# Altium PCB PCB.PcbDoc
Units mm, origin at the board's own origin, x right, y up, seen from the top; angles counter-clockwise.
Board outline 40.71 x 43.88 mm, 2 copper layers (Top Layer, Bottom Layer); 14 components, 10 nets, 39 pads, 0 vias.
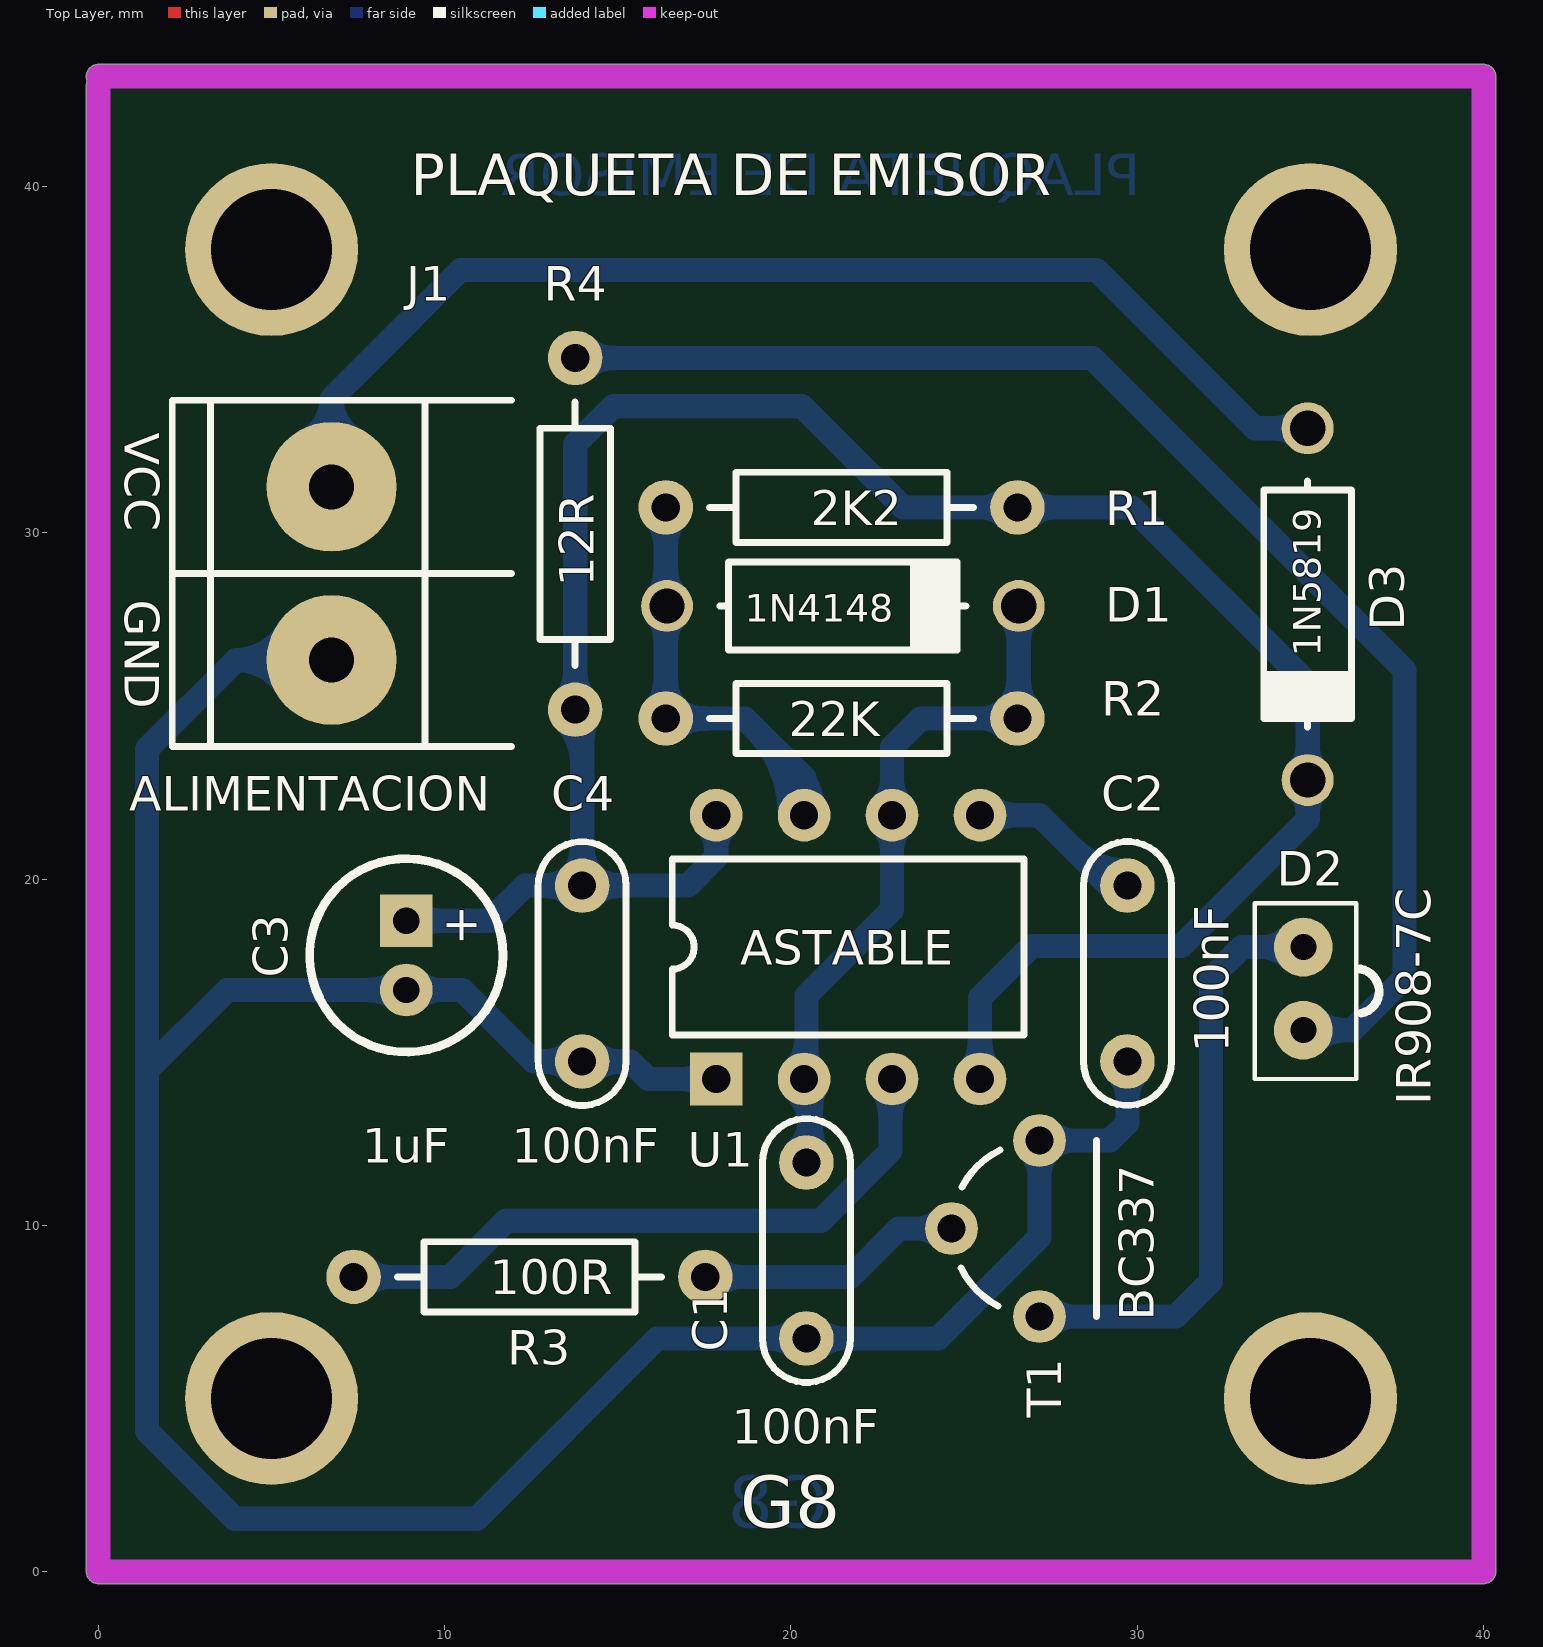
[diagram p0: Top Layer view]
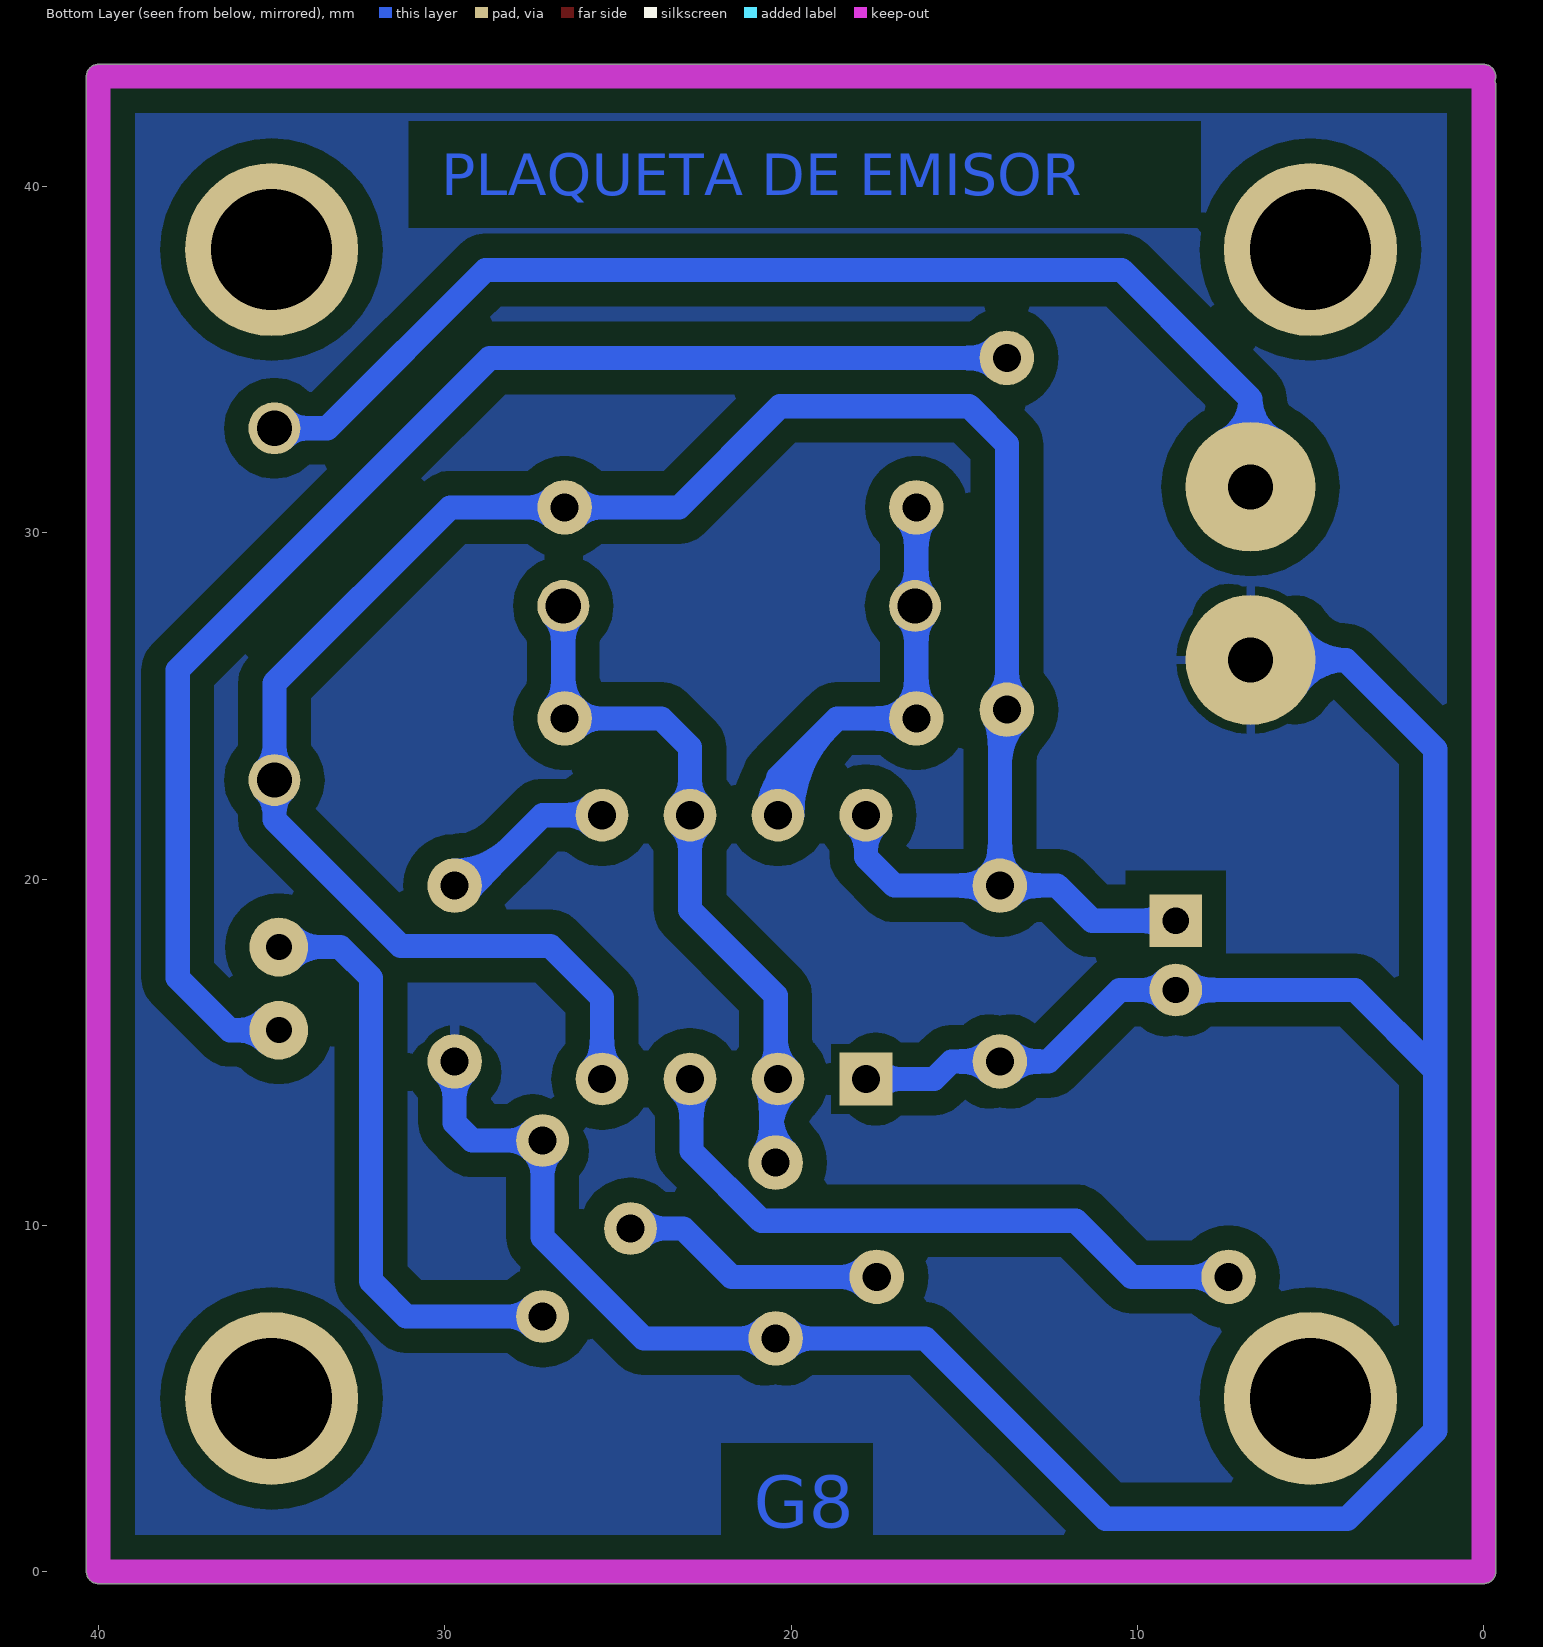
[diagram p1: Bottom Layer view, seen from below]
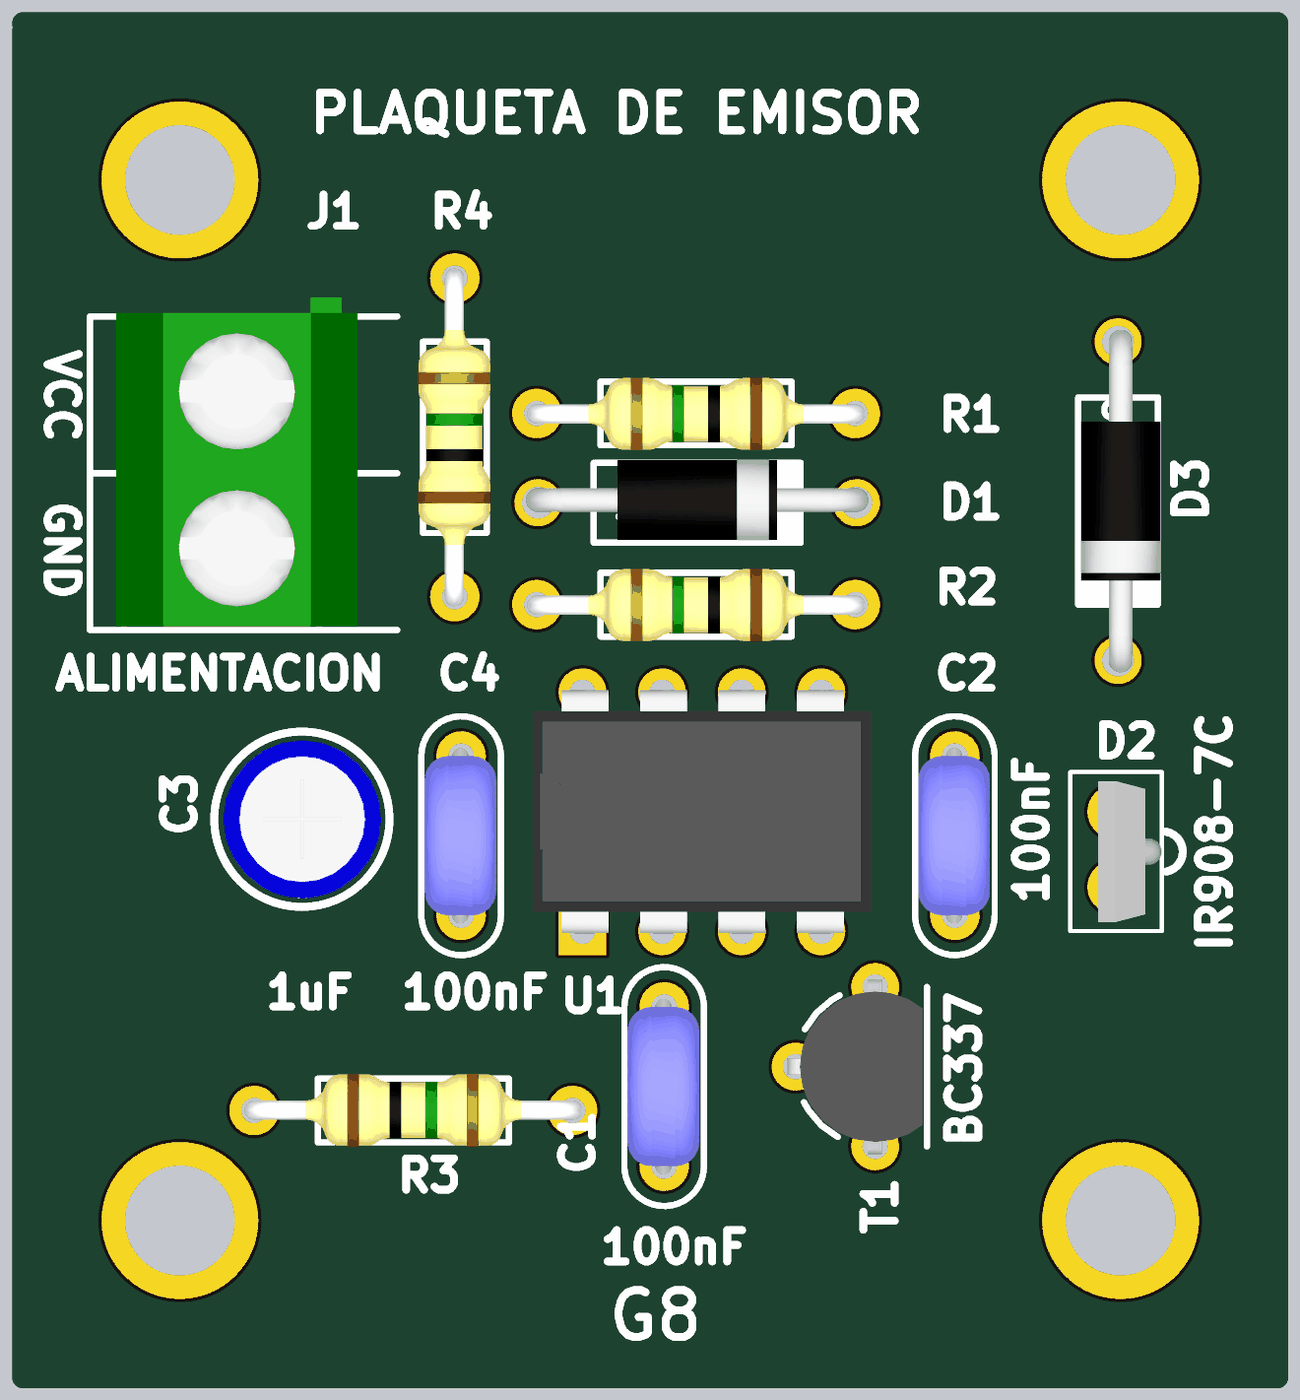
[diagram p2: 3D render of the assembled board from above, using the file's embedded part models]

## Layer stack, top to bottom
Top Solder: solder mask 0.0102, Solder Resist, Dk 3.5
Top Layer: signal copper 0.0356
Dielectric1: dielectric 0.32, FR-4, Dk 4.8
Bottom Layer: signal copper 0.0356
Bottom Solder: solder mask 0.0102, Solder Resist, Dk 3.5

## Board outline
-0.35,0 -0.35,42.926 cw(c0,42.926) -0.327,43.053 cw(c0,43.18) 0,43.53 40.005,43.53 cw(c40.005,43.18) 40.355,43.18 40.355,0 cw(c40.005,0) 40.005,-0.35 0,-0.35 cw(c0,0)

## Design rules (kind name [scope] priority, off if disabled: settings)
Clearance POLYGON [InPolygon] p1: gap=0.7
Clearance [All] p2: gap=0.3
PolygonConnect [All] p1: connectstyle=Relief reliefconductorwidth=0.254 reliefentries=4 polygonreliefangle="90 Angle" airgapwidth=0.254
RoutingVias [All] p1: holewidth=0.711 width=1.27 viastyle="Through Hole" minholewidth=0.711 minwidth=1.27 maxholewidth=0.711 maxwidth=1.27
SilkToSolderMaskClearance SilkscreenOverComponentPads [IsPad] p1: minsilkscreentomaskgap=0.254 clearancetoexposedcopper=TRUE
SolderMaskExpansion [All] p1: expansion=0.102
UnpouredPolygon [All] p1: allowunpoured=FALSE
Width [All] p1: maxlimit=0.7 minlimit=0.254 preferedwidth=0.7 toplayer_maxwidth=0.254 toplayer_prefwidth=0.254 bottomlayer_minwidth=0.7 minimp=50.000000 maximp=50.000000 favimp=50.000000
28 further rules are at their usual default settings.

## Components (designator, comment, footprint, x,y, rotation, side; value= is the part's Value field where it differs from the comment)
C1 "100nF" CAP200 20.447,9.271 r270 top
C2 "100nF" CAP200 29.72,17.272 r270 top
C3 "1uF" CAP100RP 8.89,17.796 r270 top
C4 "100nF" CAP200 13.97,17.27 r270 top
D1 "1N4148" DO41 21.5,27.888 r0 top
D2 "IR908-7C" fotodiodo 36.322,14.224 r90 top
D3 "1N5819" DO41 34.925,27.94 r270 top
J1 "ALIMENTACION" BORNERA2 6.731,28.829 r0 top
R1 "2K2" RES400 26.543,30.734 r180 top
R2 "22K" RES400 26.543,24.638 r180 top
R3 "100R" RES400 7.366,8.509 r0 top
R4 "12R" RES400 13.768,24.892 r90 top
T1 "BC337" TO92 25.908,9.906 r270 top
U1 "ASTABLE" DIP8 17.841,14.224 r90 top

## Footprints (in the part's own frame and the unit in brackets; to place one, negate y for a bottom-side part, rotate by r counter-clockwise, add the part's x,y. Pads: shape width x height; smd on the part's side, far side on the other; paste and mask are expansions set on the pad)
BORNERA2 [mm] "Bornera con Tornillos 5mm separación"
  round 3.75 hole 1.3: 1(0,2.5) 2(0,-2.5)
  silkscreen extent -4.6,-5 5.2,5, body extent -3.76,-4.89 3.94,5.61, height 10
CAP100RP [mil] "Body diameter 5mm"
  rect 60x60 hole 30: 1(-39.37,0)
  round 60 hole 30: 2(39.37,0)
  silkscreen extent -110,-110 110,110, body extent -99,-99 99,100, height 454
CAP200 [mil]
  round 62 hole 32: 1(-100,0) 2(100,0)
  silkscreen extent -150,-50 150,50, body extent -110,-46 110,44, height 246
DIP8 [mil]
  rect 60x60 hole 32: 1(0,0)
  round 60 hole 32: 2(0,-100) 3(0,-200) 4(0,-300) 5(300,-300) 6(300,-200) 7(300,-100) 8(300,0)
  silkscreen extent 50,-350 250,50, body extent -3,-363 303,63, height 177
DO41 [mm]
  round 1.5 hole 1.016: 1(-5.08,0) 2(5.08,0)
  silkscreen extent -3.56,-1.27 3.56,1.27, body extent -5.46,-1.19 5.46,1.37, height 2.03
fotodiodo [mm]
  round 1.7 hole 0.75: 1(1.41,1.524) 2(3.81,1.524)
  silkscreen extent 0,-0.67 5.08,2.92, body extent 0.29,0 4.79,2.03, height 3.38
RES400 [mil]
  round 62 hole 32: 1(0,0) 2(400,0)
  silkscreen extent 50,-40 350,40, body extent -12,-45 412,46, height 96
TO92 [mil]
  round 60 hole 32: 1(0,-50) 2(100,50) 3(-100,50)
  silkscreen extent -100,-39 100,115, body extent -110,-61 110,110, height 315

## Part data
C1 C2 C4: library part CAP
C3: library part CAPPOL
D1 D3: library part DIODO
D2: "Led infrarrojo"
J1: library part "BORNERA 2"
R1 R2 R3 R4: library part RES
T1: library part "TRANSISTOR NPN"
U1: library part LM555, "Timer"

## Free pads (board coordinates)
  round 5 hole 3.5: 0(5,38.18) 1(35.005,38.18) 2(35.005,5) 3(5,5)

## Nets (pads, with @x,y where several pads share a name; then routed paths per layer and width w, separated by ;. In a path a pad name is that pad's centre, name@x,y a point inside that pad or via, vN(x,y) a via of type N, cw(c..) or ccw(c..) an arc to the next point about the centre after c; other vN are vias at no path point)
GND: C1.2 C2.2 C3.2 C4.2 J1.2 T1.3 U1.1 | length 102.9
  Bottom Layer w0.7: J1.2@5.438,25.52 ccw(c3.977,24.605) 3.977,26.329 ccw(c3.977,28.053) J1.2@5.438,27.138 ; J1.2@6.477,26.583 J1.2@7.366,27.472 ; J1.2 3.977,26.329 1.397,23.749 1.397,14.478 ; C3.2@8.599,16.505 ccw(c7.895,15.801) 7.895,16.796 ccw(c7.895,17.791) C3.2@8.599,17.087 ; C3.2@9.181,16.505 cw(c9.885,15.801) 9.885,16.796 cw(c9.885,17.791) C3.2@9.181,17.087 ; C4.2@13.661,14.421 ccw(c12.914,13.674) 12.914,14.73 ccw(c12.914,15.786) C4.2@13.661,15.04 ; C4.2@14.279,14.421 cw(c15.026,13.674) 15.026,14.73 cw(c15.026,15.786) C4.2@14.279,15.04 ; U1.1@17.55,13.933 ccw(c16.846,13.229) 16.846,14.224 ccw(c16.846,15.219) U1.1@17.55,14.515 ; U1.1 15.875,14.224 15.369,14.73 C4.2 12.575,14.73 10.509,16.796 C3.2 3.715,16.796 1.397,14.478 ; C1.2@20.138,6.422 ccw(c19.391,5.675) 19.391,6.731 ccw(c19.391,7.787) C1.2@20.138,7.04 ; C1.2@20.756,6.422 cw(c21.503,5.675) 21.503,6.731 cw(c21.503,7.787) C1.2@20.756,7.04 ; T1.3@26.887,12.155 cw(c26.183,11.451) 27.178,11.451 cw(c28.173,11.451) 27.469,12.155 cw(c28.173,11.451) 28.173,12.446 cw(c28.173,13.441) T1.3@27.469,12.737 ; C2.2@29.41,14.423 cw(c28.664,13.676) 29.72,13.676 cw(c30.776,13.676) C2.2@30.029,14.423 ; C2.2 29.72,12.956 29.21,12.446 T1.3 27.178,9.652 24.257,6.731 C1.2 16.129,6.731 10.922,1.524 3.937,1.524 1.397,4.064 1.397,14.478
NetC2_1: C2.1 U1.5 | length 8.3
  Bottom Layer w0.7: U1.5@25.146,21.844 27.178,21.844 C2.1@29.21,19.812 ; U1.5@25.752,21.553 cw(c26.456,20.849) 26.456,21.844 cw(c26.456,22.839) U1.5@25.752,22.135 ; 28.103,20.919 ccw(c29.72,22.536) C2.1@29.72,20.249
NetD1_1: D1.1 R1.2 R2.2 U1.7 | length 25.8
  Bottom Layer w0.7: R2.2@16.074,24.947 ccw(c15.327,25.694) 16.383,25.694 ccw(c17.439,25.694) 16.692,24.947 ccw(c17.439,25.694) 17.439,24.638 ccw(c17.439,23.582) R2.2@16.692,24.329 ; R1.2@16.074,30.425 cw(c15.327,29.678) 16.383,29.678 cw(c17.439,29.678) R1.2@16.692,30.425 ; D1.1@16.138,27.605 cw(c15.545,27.012) 16.383,27.012 ; D1.1@16.138,28.17 ccw(c15.545,28.763) 16.383,28.763 ; 16.383,26.832 cw(c17.476,26.832) D1.1@16.703,27.605 ; 16.383,28.944 ccw(c17.476,28.944) D1.1@16.703,28.17 ; R1.2 R2.2 18.669,24.638 20.381,22.926 U1.7 ; 18.913,24.394 cw(c16.362,21.844) U1.7@19.969,21.844 ; U1.7@20.09,22.135 ccw(c19.386,22.839) 20.381,22.839 ccw(c21.376,22.839) U1.7@20.672,22.135 ; 20.108,23.199 cw(c18.752,21.844) U1.7@20.669,21.844
NetD2_1: D2.1 R4.2 | length 44
  Bottom Layer w0.7: R4.2@13.462,35.052 14.197,35.052 26.035,35.052 26.543,35.052 28.702,35.052 37.719,26.035 37.719,17.145 36.208,15.634 D2.1 ; R4.2@14.078,34.743 cw(c14.824,33.996) 14.824,35.052 cw(c14.824,36.108) R4.2@14.078,35.361 ; D2.1@35.152,15.28 cw(c36.005,14.427) 36.005,15.634 cw(c36.005,16.841) D2.1@35.152,15.988
NetD2_2: D2.2 T1.2 | length 21
  Bottom Layer w0.7: T1.2@26.94,7.604 T1.2 31.115,7.366 32.131,8.382 32.131,17.145 33.02,18.034 D2.2 ; T1.2@27.469,7.075 cw(c28.173,6.371) 28.173,7.366 cw(c28.173,8.361) T1.2@27.469,7.657 ; D2.2@34.444,17.68 ccw(c33.591,16.827) 33.591,18.034 ccw(c33.591,19.241) D2.2@34.444,18.388
NetD3_1: D3.1 J1.1 | length 39.1
  Bottom Layer w0.7: J1.1@6.014,32.675 ccw(c5.378,33.869) 6.731,33.869 ccw(c8.084,33.869) J1.1@7.448,32.675 ; J1.1 6.731,33.869 7.703,34.842 ; 7.366,34.504 7.703,34.842 ; D3.1@34.642,32.737 ccw(c33.959,32.054) 33.959,33.02 ccw(c33.959,33.986) D3.1@34.642,33.303 ; D3.1 33.401,33.02 28.829,37.592 10.454,37.592 7.703,34.842
NetR3_1: R3.1 U1.3 | length 22.3
  Bottom Layer w0.7: R3.1 10.16,8.509 11.78,10.129 20.859,10.129 22.875,12.145 22.875,14.178 U1.3 ; R3.1@7.675,8.2 cw(c8.422,7.453) 8.422,8.509 cw(c8.422,9.565) R3.1@7.675,8.818 ; U1.3@22.63,13.933 cw(c22.037,13.34) 22.875,13.34 ; 22.875,13.118 cw(c24.027,13.118) U1.3@23.212,13.933
NetR3_2: R3.2 T1.1 | length 10.9
  Bottom Layer w0.7: R3.2 21.717,8.509 23.114,9.906 T1.1 ; R3.2@17.835,8.2 cw(c18.582,7.453) 18.582,8.509 cw(c18.582,9.565) R3.2@17.835,8.818 ; T1.1@24.347,9.615 ccw(c23.643,8.911) 23.643,9.906 ccw(c23.643,10.901) T1.1@24.347,10.197
THR: C1.1 D1.2 R2.1 U1.2 U1.6 | length 31.8
  Bottom Layer w0.7: U1.2@20.09,13.933 cw(c18.92,12.763) 20.574,12.763 ; U1.2@20.09,14.515 ccw(c19.227,15.378) 20.447,15.378 ; C1.1@20.138,12.12 ccw(c19.084,13.174) 20.574,13.174 ; U1.2 20.574,14.031 C1.1@20.574,12.319 ; U1.2@20.447,14.224 20.447,16.637 22.921,19.111 U1.6 22.921,23.81 23.749,24.638 R2.1 26.58,24.675 D1.2 ; 20.447,15.059 ccw(c21.216,15.059) U1.2@20.672,14.515 ; U1.6@22.63,21.553 cw(c21.926,20.849) 22.921,20.849 cw(c23.916,20.849) U1.6@23.212,21.553 ; U1.6@22.63,22.135 ccw(c21.926,22.839) 22.921,22.839 ccw(c23.916,22.839) U1.6@23.212,22.135 ; R2.1@26.234,24.329 ccw(c25.487,23.582) 25.487,24.638 ccw(c25.487,25.694) 26.234,24.947 ccw(c25.397,25.784) 26.58,25.784 ; D1.2@26.298,27.605 cw(c25.615,26.922) 26.58,26.922 cw(c27.546,26.922) D1.2@26.863,27.605 ; 26.58,25.604 ccw(c27.509,25.604) R2.1@26.852,24.947
VCC: C3.1 C4.1 D3.2 R1.1 R4.1 U1.4 U1.8 | length 86.8
  Bottom Layer w0.7: C3.1 11.303,18.796 12.317,19.81 C4.1 ; C3.1@9.181,18.505 cw(c9.885,17.801) 9.885,18.796 cw(c9.885,19.791) C3.1@9.181,19.087 ; R4.1@13.459,24.583 cw(c12.226,23.349) 13.97,23.349 ; R4.1@13.459,25.201 ccw(c12.712,25.948) 13.768,25.948 ccw(c14.824,25.948) R4.1@14.078,25.201 ; C4.1@13.661,19.501 ccw(c12.914,18.754) 12.914,19.81 ccw(c12.914,20.866) 13.661,20.12 ccw(c12.914,20.866) 13.97,20.866 ccw(c15.026,20.866) 14.279,20.12 ccw(c15.026,20.866) 15.026,19.81 ccw(c15.026,18.754) C4.1@14.279,19.501 ; R4.1 13.768,32.564 14.859,33.655 20.32,33.655 23.241,30.734 R1.1 ; R4.1@13.97,24.892 C4.1 ; U1.8@17.55,21.553 cw(c16.846,20.849) 17.841,20.849 cw(c18.836,20.849) U1.8@18.132,21.553 ; U1.8@17.841,21.524 U1.8 17.841,20.635 17.016,19.81 C4.1 ; U1.4@25.146,14.224 U1.4 25.461,16.571 26.956,18.066 31.274,18.066 34.925,21.717 D3.2 ; U1.4@25.17,14.515 ccw(c24.466,15.219) 25.461,15.219 ccw(c26.456,15.219) U1.4@25.752,14.515 ; R1.1@26.234,30.425 ccw(c25.487,29.678) 25.487,30.734 ccw(c25.487,31.79) R1.1@26.234,31.043 ; R1.1@26.852,30.425 cw(c27.599,29.678) 27.599,30.734 cw(c27.599,31.79) R1.1@26.852,31.043 ; R1.1@27.051,30.734 R1.1 ; D3.2@34.642,22.577 cw(c33.959,21.894) 34.925,21.894 cw(c35.891,21.894) D3.2@35.208,22.577 ; D3.2@34.642,23.143 ccw(c33.959,23.826) 34.925,23.826 ccw(c35.891,23.826) D3.2@35.208,23.143 ; D3.2@34.798,22.987 D3.2 ; R1.1 29.845,30.734 34.925,25.654 D3.2

## Polygon pours and split planes (outlines as drawn)
GND on Bottom Layer "Bottom Layer-No Net" (solid, pour order 2): 0,43.18 40.005,43.18 40.005,0 39.878,-0.127 -0.254,-0.127

## Keep-outs
Keep-Out Layer:
  lines w0.7: 0,42.926 0,0 40.005,0 40.005,43.18 0,43.18

## Other copper
Bottom Layer:
  text "PLAQUETA DE EMISOR" at 30.099,39.751 h1.2
  text "G8" at 21.082,1.27 h1.5

## Silkscreen, mask and mechanical layers (free items; w line width, h text height)
Top Overlay:
  text "PLAQUETA DE EMISOR" at 9.017,39.751 h1.2
  text "VCC" at 0.762,32.893 h1 r270
  text "GND" at 0.762,28.067 h1 r270
  text "G8" at 18.542,1.27 h1.5

## Text inside footprints (layer, text, board x,y; h text height)
C3: Top Overlay "+" at 10.058,19.244 h1.02 r270